# Altium PCB PCB Doc.PcbDoc (part 1 of 2)
Units mm, origin at the board's own origin, x right, y up, seen from the top; angles counter-clockwise.
Board outline 76.61 x 32.18 mm, 4 copper layers (Top Layer, Ground Planes, Power Planes, Bottom Layer), stack 0.778 mm thick; 49 components, 50 nets, 397 pads, 104 vias.
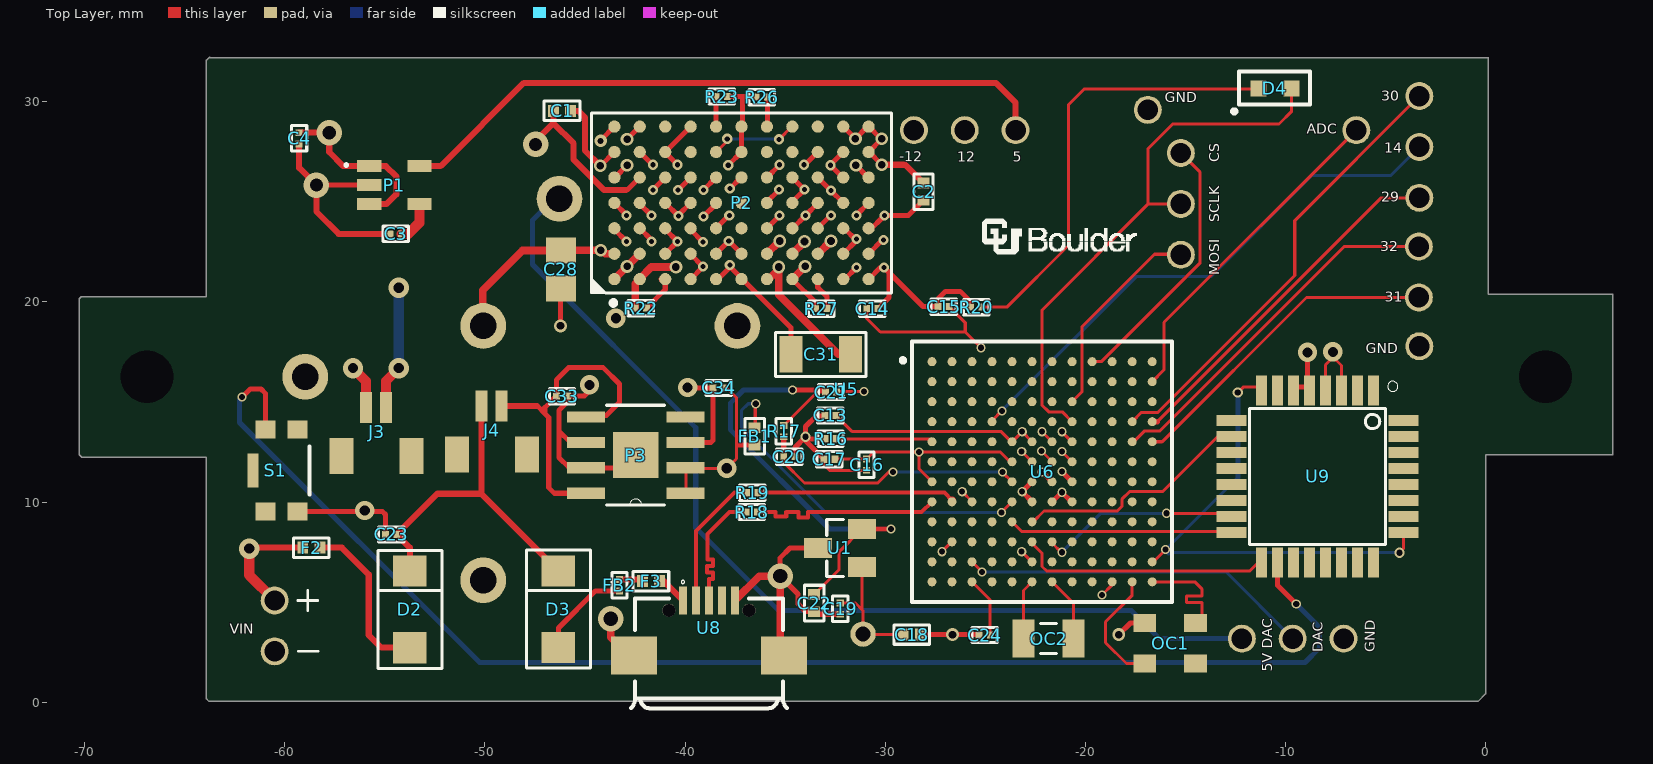
[diagram p0: Top Layer view]
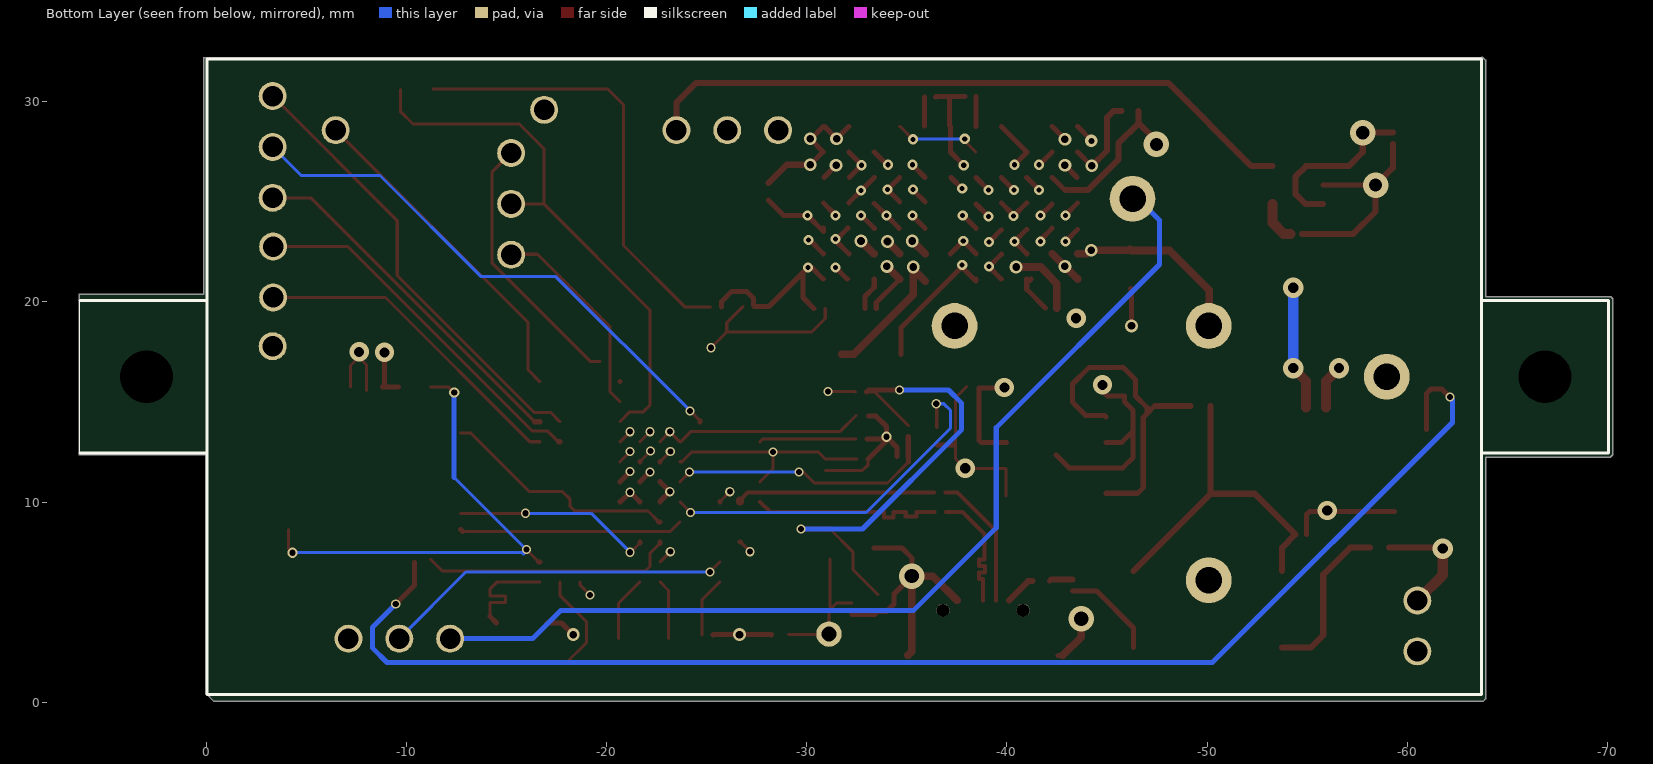
[diagram p1: Bottom Layer view, seen from below]
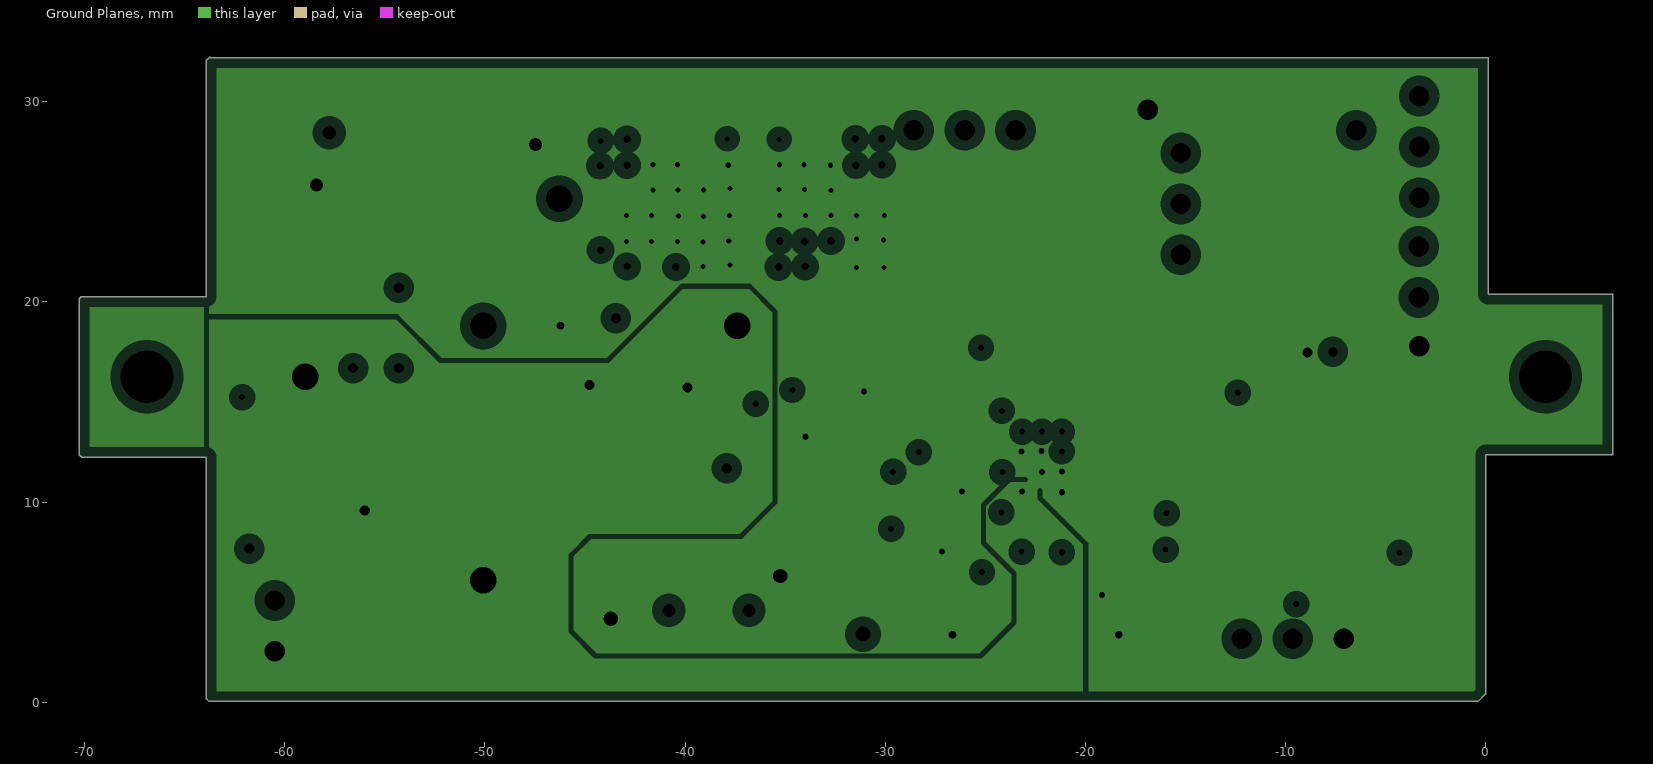
[diagram p2: Ground Planes, clearances drawn from the general rule]
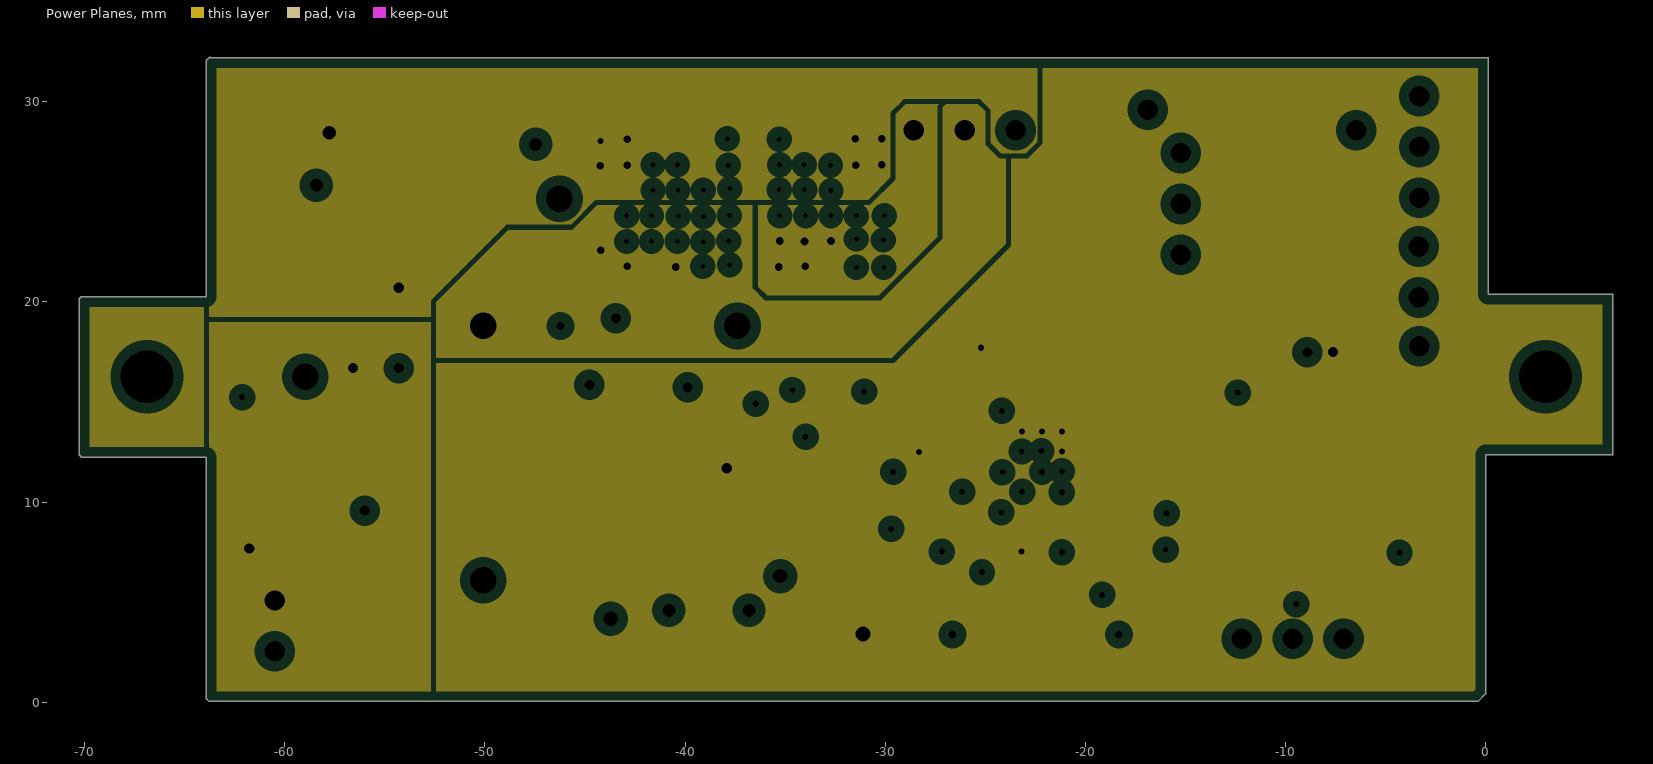
[diagram p3: Power Planes, clearances drawn from the general rule]
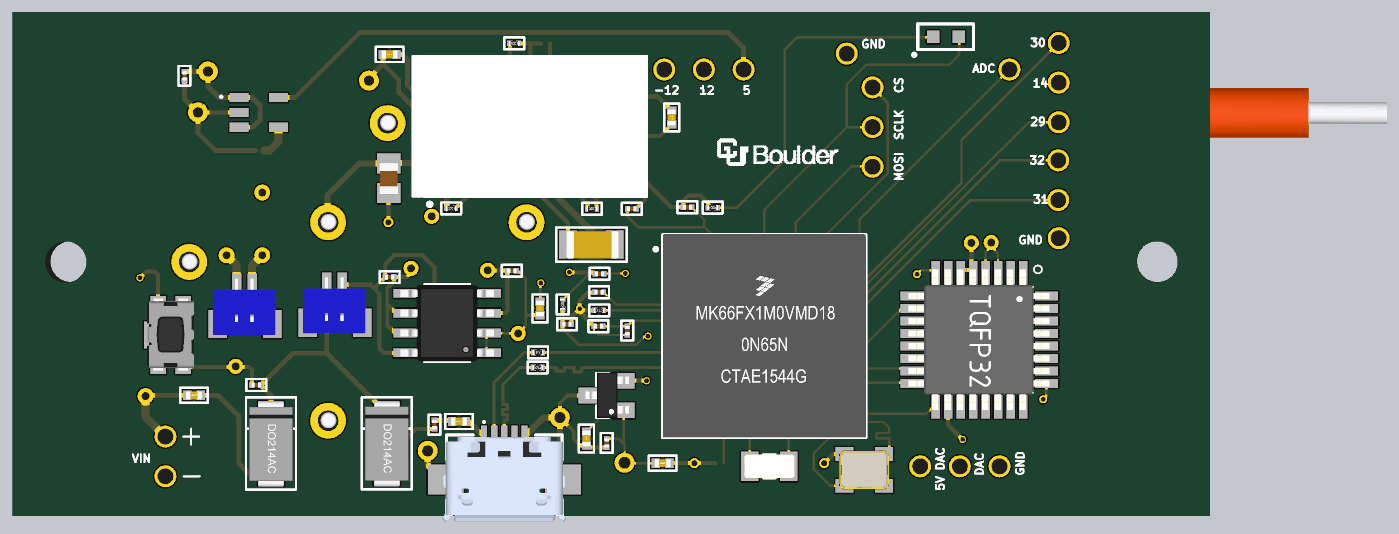
[diagram p5: 3D render of the assembled board from above, using the file's embedded part models]

## Layer stack, top to bottom
Top Solder: solder mask 0.0102, Solder Resist, Dk 3.5
Top Layer: signal copper 0.0356
Dielectric 1: core 0.254, FR-4, Dk 4.2
Ground Planes: plane copper 0.036, net VSSA
Dielectric 2: prepreg 0.127, Dk 4.2
Power Planes: plane copper 0.036, net (Multiple Nets)
Dielectric 5: core 0.254, Dk 4.2
Bottom Layer: signal copper 0.0356
Bottom Solder: solder mask 0.0102, Solder Resist, Dk 3.5

## Board outline
-70.139,12.234 ccw(c-70.129,12.243) -70.129,12.23 -63.919,12.23 -63.919,0.178 ccw(c-63.906,0.178) -63.916,0.169 -63.789,0.042 ccw(c-63.779,0.051) -63.779,0.038 -0.406,0.038 ccw(c-0.406,0.051) -0.397,0.042 -0.016,0.423 ccw(c-0.025,0.432) -0.012,0.432 -0.012,12.357 6.325,12.357 ccw(c6.325,12.37) 6.338,12.37 6.338,20.371 ccw(c6.325,20.371) 6.325,20.384 0.115,20.384 0.115,32.182 ccw(c0.102,32.182) 0.102,32.195 -63.779,32.195 ccw(c-63.779,32.182) -63.789,32.191 -63.763,32.216 cw(c-63.754,32.207) -63.741,32.207 cw(c-63.754,32.207) -63.745,32.198 -63.748,32.195 -63.763,32.216 -63.916,32.064 ccw(c-63.906,32.055) -63.919,32.055 -63.919,20.257 -70.155,20.257 ccw(c-70.155,20.244) -70.164,20.253 -70.266,20.151 ccw(c-70.256,20.142) -70.269,20.142 -70.269,12.37 ccw(c-70.256,12.37) -70.266,12.361

## Design rules (kind name [scope] priority, off if disabled: settings)
Clearance Clearance_BGA_LTM8049 [WithinRoom('BGA_LTM8049')] p1: gap=0.152 ignorepadtopadclearanceinfootprint=FALSE
Clearance Clearance_BGA_MK66 [WithinRoom('BGA_MK66')] p2: gap=0.152 ignorepadtopadclearanceinfootprint=FALSE
Clearance [All] p3 off: gap=0.254 ignorepadtopadclearanceinfootprint=FALSE except(0: Arc-Hole Track-Hole SMDPad-Hole THPad-Hole Via-Hole Fill-Hole Poly-Hole Region-Hole Text-Hole)
DiffPairsRouting [All] p1: maxlimit=0.254 minlimit=0.254 mostfreqgap=0.254 toplayer_minwidth=0.381 toplayer_maxwidth=0.381 toplayer_prefwidth=0.381 bottomlayer_minwidth=0.381 bottomlayer_maxwidth=0.381 bottomlayer_prefwidth=0.381 maxuncoupledlength=12.7
PlaneClearance [All] p1: clearance=0.508
PlaneConnect [All] p1: planeconnectstyle=Relief reliefexpansion=0.203 reliefentries=4 reliefconductorwidth=0.254 reliefairgap=0.152
PolygonConnect [All] p1: connectstyle=Relief reliefconductorwidth=0.152 reliefentries=4 polygonreliefangle="90 Angle" airgapwidth=0.152
RoomDefinition MCU [InComponentClass('MCU')] p1: confinementstyle=ConfineIn formatcopy=TRUE lockcomponents=FALSE outline -116.23,-55.194 -65.43,-55.194 -65.43,-29.794 -116.23,-29.794
RoomDefinition "EMCO DC-DC" [InComponentClass('EMCO DC-DC')] p2: confinementstyle=ConfineIn formatcopy=TRUE lockcomponents=FALSE outline -116.23,-55.194 -65.43,-55.194 -65.43,-29.794 -116.23,-29.794
RoutingVias RoutingVias_BGA_LTM8049 [WithinRoom('BGA_LTM8049')] p1: holewidth=0.381 width=0.762 viastyle="Through Hole" minholewidth=0.381 minwidth=0.762 maxholewidth=0.381 maxwidth=0.762
RoutingVias RoutingVias_BGA_MK66 [WithinRoom('BGA_MK66')] p2: holewidth=0.305 width=0.559 viastyle="Through Hole" minholewidth=0.305 minwidth=0.559 maxholewidth=0.305 maxwidth=0.559
RoutingVias [All] p3: holewidth=0.711 width=1.27 viastyle="Through Hole" minholewidth=0.254 minwidth=0.381 maxholewidth=0.711 maxwidth=1.27
SolderMaskExpansion [All] p1: expansion=0.102
Width Width_VDD [InNet('VDD')] p1: maxlimit=0.152 minlimit=0.152 preferedwidth=0.152
Width Width_3.9/5 [InNet('3.9V/5V')] p2: maxlimit=0.508 minlimit=0.305 preferedwidth=0.508
Width Width_-12V [InNet('-12V')] p3: maxlimit=0.381 minlimit=0.381 preferedwidth=0.381
Width Width_12V [InNet('12V')] p4: maxlimit=0.381 minlimit=0.381 preferedwidth=0.381
Width Width_Battery [InNet('Battery')] p5: maxlimit=0.508 minlimit=0.305 preferedwidth=0.508
Width [All] p6 off: maxlimit=0.152 minlimit=0.152 preferedwidth=0.152
Width Width_BGA_LTM8049 [WithinRoom('BGA_LTM8049')] p7: maxlimit=0.152 minlimit=0.152 preferedwidth=0.152
Width Width_BGA_MK66 [WithinRoom('BGA_MK66')] p8: maxlimit=0.152 minlimit=0.152 preferedwidth=0.152
Width Width_5V [InNet('5V')] p9: maxlimit=0.508 minlimit=0.305 preferedwidth=0.305
27 further rules are at their usual default settings.

## Classes and differential pairs
component class "EMCO DC-DC": U5
component class MCU: C13 C14 C15 C16 C17 C18 C19 C20 C21 C22 C23 C24 D2 D3 D4 F2 F3 FB1 FB2 OC1 OC2 R16 R17 R18 R19 R20 S1 U1 U6 U8 U9
component class "Voltage Regulators": C1 C2 C3 C4 C28 C31 C33 C34 J3 J4 P1 P2 P3 R22 R23 R26 R27
differential pair USBD: +USBD_P -USBD_N
differential pair usb: +usb_P -usb_N

## Components (designator, comment, footprint, x,y, rotation, side; value= is the part's Value field where it differs from the comment)
C1 "GRM155R60J475" C0402C102K9RACTU -46.152,29.54 r180 top value=4.7uF
C2 "GRM155R60J475" C0402C102K9RACTU -28.092,25.502 r270 top value=4.7uF
C3 "CL03A104KA3NNNC" CL03A104KA3NNNC -46.202,37.744 r180 top value=0.1uF
C4 "CL03A104KA3NNNC" CL03A104KA3NNNC -44.933,19.914 r90 top value=0.1uF
C13 "CL03A104KA3NNNC" CL03A104KA3NNNC -24.486,28.677 r180 top value=0.1uF
C14 "CL03B103KP3NNNC" CL03B103KP3NNNC -38.906,5.309 r0 top value=0.01uF
C15 "CL03A225MP3CRNC" CL03A225MP3CRNC -18.84,34.112 r180 top value=2.2uF
C16 "CL03A104KA3NNNC" CL03A104KA3NNNC -45.288,20.117 r270 top value=0.1uF
C17 "CL03A104KA3NNNC" CL03A104KA3NNNC -24.536,26.492 r180 top value=0.1uF
C18 "GRM155R60J106ME47D" GRM155R60J106ME47D -28.675,3.378 r180 top value=10uF
C19 "CL03A104KA3NNNC" CL03A104KA3NNNC -46.609,12.928 r270 top value=0.1uF
C20 "CL03A104KA3NNNC" CL03A104KA3NNNC -43.054,-2.083 r0 top value=0.1uF
C21 "CL03A225MP3CRNC" CL03A225MP3CRNC -24.46,29.845 r180 top value=2.2uF
C22 "C0402C102K9RACTU" C0402C102K9RACTU -33.553,4.953 r270 top value=1000pF
C23 "CL03A225MP3CRNC" CL03A225MP3CRNC -46.432,22.733 r180 top value=2.2uF
C24 "CL03A104KA3NNNC" CL03A104KA3NNNC -33.3,-10.998 r0 top value=0.1uF
C28 "CL21A226MAQNNNE" CL21A226MAQNNNE -46.203,21.615 r270 top value=22uF
C31 "GRM31CR61E476ME44L" GRM31CR61E476ME44L -30.367,17.221 r0 top value=33uF
C33 "GRM033R60J105MEA2D" GRM033R60J105MEA2D -54.407,0.94 r0 top value=1uF
C34 "GRM033R60J105MEA2D" GRM033R60J105MEA2D -30.074,30.048 r180 top value=1uF
D2 "LSM115JE3/TR13" LSM115JE3/TR13 -53.797,5.07 r270 top
D3 "LSM115JE3/TR13" LSM115JE3/TR13 -46.38,5.08 r270 top
D4 "SML-LXFM0603SUGCTR" SML-LXFM0603SUGCTR -10.541,30.658 r180 top
F2 "ERB-SD0R50U" ERB-SD0R50U -58.674,7.722 r0 top
F3 "ERB-SD0R50U" ERB-SD0R50U -41.709,6.045 r0 top
FB1 "BLM15PX601SN1D" BLM15PX601SN1D -36.525,13.282 r90 top value=600
FB2 "MPZ0603S121HT000" MPZ0603S121HT000 -57.633,14.098 r270 top value=120
J3 "BM02B-SRSS-TBT" BM02B-SRSS-TBT -54.57,13.868 r0 top
J4 "BM02B-SRSS-TBT" BM02B-SRSS-TBT -48.804,13.945 r0 top
OC1 "TSX-3225 16.0000MF18X-AC3" "TSX-3225 16.0000MF18X-AC3" -15.773,2.946 r180 top value=16MHz
OC2 "ECS-.327-9-34QS-TR" ECS-.327-9-34QS-TR -21.849,3.175 r0 top value=32.768kHz
P1 "REG113NA" REG113NA-5/3K -54.529,25.832 r0 top
P2 "LTM8049EY#PBF" LTM8049EY#PBF -37.186,24.943 r90 top
P3 "ADP7104ACPZ-3.3-R7" ADP7104ARDZ-3.3 -42.469,12.344 r180 top
R16 "RC0201FR-07100KL" RC0201FR-07100KL -24.485,27.508 r180 top value=100k
R17 "RC0201JR-07470RL" RC0201JR-07470RL -49.428,21.794 r270 top value=470
R18 "RC0201JR-0733RL" RC0201JR-0733RL -28.422,23.851 r180 top value=33
R19 "RC0201JR-0733RL" RC0201JR-0733RL -28.397,24.816 r180 top value=33
R20 "RC0201FR-07140RL" RC0201FR-07140RL -17.214,34.087 r180 top value=140
R22 "RC0201FR-07130KL" RC0201FR-07130KL -50.469,5.334 r0 top value=130k
R23 "RC0201FR-0780K6L" RC0201FR-0780K6L -46.432,15.9 r0 top value=80.6k
R26 "RC0201FR-0780K6L" RC0201FR-0780K6L -27.914,44.577 r180 top value=80.6k
R27 "RC0201FR-07143KL" RC0201FR-07143KL -41.453,5.309 r0 top value=143k
S1 "KMR231NG LFS" KMR221GLFS -60.173,11.582 r90 top
U1 "ISL60002BIH325Z-T7A" ISL60002-25 -32.266,7.706 r90 top
U5 "C80" C80 -0.051,32.131 r180 top
U6 "MK66FX1M0VMD18" MK66FX1M0VMD18 -22.173,11.511 r0 top
U8 "10118192-0001LF" 10118192-0001LF -38.811,2.337 r0 top
U9 "MKL04Z32VLC4" MKL04Z32VLC4-ND -8.407,11.278 r270 top

## Footprints (in the part's own frame and the unit in brackets; to place one, negate y for a bottom-side part, rotate by r counter-clockwise, add the part's x,y. Pads: shape width x height; smd on the part's side, far side on the other; paste and mask are expansions set on the pad)
10118192-0001LF [mm]
  rect 0.4x1.4 smd: 1(-1.3,2.75) 2(-0.65,2.75) 3(0,2.75) 4(0.65,2.75) 5(1.3,2.75)
  rect 2.3x1.9 smd: 6(-3.75,0) 7(3.75,0)
  round 0.65 hole 0.65 unplated: None(-2,2.25) None(2,2.25)
  silkscreen extent -3.89,-2.64 3.89,3.75, body extent -3.99,-2.7 3.99,2.73, height 2.74
ADP7104ARDZ-3.3 [mil]
  rect 75x22 smd: 1(-98,75) 2(-98,25) 3(-98,-25) 4(-98,-75) 5(98,-75) 6(98,-25) 7(98,25) 8(98,75)
  rect 90x90 smd: 9(0,0)
  silkscreen extent -57,-98 57,99, body extent -118,-96 118,96, height 67
BLM15PX601SN1D [mm]
  rect 0.54x0.6 smd: 1(-0.43,0) 2(0.43,0)
  silkscreen extent -0.89,-0.48 0.89,0.48, body extent -0.53,-0.28 0.52,0.27, height 0.55
BM02B-SRSS-TBT [mm]
  rect 0.6x1.55 smd: 1(-1.377,0.86) 2(-0.377,0.86)
  rect 1.2x1.8 smd: ""(-2.591,-1.575) ""(0.9,-1.575)
  body extent -2.89,-2.28 1.11,1.32, height 4.28
C80 [mil]
  round 90 hole 52: 1(1970,525) 2(1970,1025) 3(1820,275) 4(1470,525) 5(2320,625)
  round 0 hole 104 unplated: ""(-119,625) ""(2631,625)
  body extent -698,-1 2749,1249, height 100
C0402C102K9RACTU [mm]
  rect 0.54x0.6 smd: 1(-0.43,0) 2(0.43,0)
  silkscreen extent -0.89,-0.48 0.89,0.48, body extent -0.53,-0.28 0.52,0.27, height 0.55
CL03A104KA3NNNC [mm]
  rect 0.34x0.36 smd: 1(7.975,14.351) 2(8.535,14.351)
  silkscreen extent 7.62,13.97 8.89,14.73, body extent 7.96,14.2 8.56,14.5, height 0.3
CL03A225MP3CRNC [mm]
  rect 0.34x0.36 smd: 1(7.975,14.351) 2(8.535,14.351)
  silkscreen extent 7.62,13.97 8.89,14.73, body extent 7.96,14.2 8.56,14.5, height 0.3
CL03B103KP3NNNC [mm]
  rect 0.34x0.36 smd: 1(7.975,14.351) 2(8.535,14.351)
  silkscreen extent 7.62,13.97 8.89,14.73, body extent 7.96,14.2 8.56,14.5, height 0.3
CL21A226MAQNNNE [mm]
  rect 1.3x1.5 smd: 1(-0.95,0) 2(0.95,0)
  body extent -0.97,-0.6 1.03,0.6, height 0.95
ECS-.327-9-34QS-TR [mm]
  rect 1.1x1.9 smd: 1(-1.25,0) 2(1.25,0)
  silkscreen extent -0.4,-0.75 0.4,0.75, body extent -1.6,-0.75 1.6,0.75, height 0.9
ERB-SD0R50U [mm]
  rect 0.54x0.6 smd: 1(-0.43,0) 2(0.43,0)
  silkscreen extent -0.89,-0.48 0.89,0.48, body extent -0.53,-0.28 0.52,0.27, height 0.55
GRM31CR61E476ME44L [mm]
  rect 1.15x1.82 smd: 1(-4.355,0.152) 2(-1.385,0.152)
  silkscreen extent -5.13,-0.95 -0.61,1.24, body extent -4.49,-0.76 -1.09,1.04, height 1.79
GRM033R60J105MEA2D [mm]
  rect 0.34x0.36 smd: 1(7.975,14.351) 2(8.535,14.351)
  silkscreen extent 7.62,13.97 8.89,14.73, body extent 7.96,14.2 8.56,14.5, height 0.3
GRM155R60J106ME47D [mm]
  rect 0.54x0.6 smd: 1(-0.43,0) 2(0.43,0)
  silkscreen extent -0.89,-0.48 0.89,0.48, body extent -0.53,-0.28 0.52,0.27, height 0.55
ISL60002-25 [mm]
  rect 1x1.4 smd: 1(-0.95,-1.1) 2(0.95,-1.1) 3(0,1.1)
  silkscreen extent -1.42,-0.19 1.42,0.66, body extent -1.42,-1.45 1.48,1.35, height 1.3
KMR221GLFS [mm]
  rect 0.9x1 smd: 1(-2.05,0.8) 2(-2.05,-0.8) 3(2.05,-0.8) 4(2.05,0.8)
  rect 1.7x0.55 smd: 5(0,1.425)
  silkscreen extent -1.2,-1.4 1.2,-1.4, body extent -2.27,-1.5 2.33,1.5, height 2.1
LSM115JE3/TR13 [mm]
  rect 1.555x1.67 smd: 1(-1.483,0.051) 2(2.347,0.051)
  silkscreen extent -2.52,-1.55 3.38,1.65, body extent -2.29,-1.35 3.2,1.45, height 2.36
LTM8049EY#PBF [mm]
  round 0.61 smd: A1(-3.81,6.35) A2(-2.54,6.35) A3(-1.27,6.35) A4(0,6.35) A5(1.27,6.35) A6(2.54,6.35) A7(3.81,6.35) B1(-3.81,5.08) B2(-2.54,5.08) B3(-1.27,5.08) B4(0,5.08) B5(1.27,5.08) B6(2.54,5.08) B7(3.81,5.08) C1(-3.81,3.81) C2(-2.54,3.81) C3(-1.27,3.81) C4(0,3.81) C5(1.27,3.81) C6(2.54,3.81) C7(3.81,3.81) D1(-3.81,2.54) D2(-2.54,2.54) D3(-1.27,2.54) D4(0,2.54) D5(1.27,2.54) D6(2.54,2.54) D7(3.81,2.54) E1(-3.81,1.27) E2(-2.54,1.27) E3(-1.27,1.27) E4(0,1.27) E5(1.27,1.27) E6(2.54,1.27) E7(3.81,1.27) F1(-3.81,0) F2(-2.54,0) F3(-1.27,0) F4(0,0) F5(1.27,0) F6(2.54,0) F7(3.81,0) G1(-3.81,-1.27) G2(-2.54,-1.27) G3(-1.27,-1.27) G4(0,-1.27) G5(1.27,-1.27) G6(2.54,-1.27) G7(3.81,-1.27) H1(-3.81,-2.54) H2(-2.54,-2.54) H3(-1.27,-2.54) H4(0,-2.54) H5(1.27,-2.54) H6(2.54,-2.54) H7(3.81,-2.54) J1(-3.81,-3.81) J2(-2.54,-3.81) J3(-1.27,-3.81) J4(0,-3.81) J5(1.27,-3.81) J6(2.54,-3.81) J7(3.81,-3.81) K1(-3.81,-5.08) K2(-2.54,-5.08) K3(-1.27,-5.08) K4(0,-5.08) K5(1.27,-5.08) K6(2.54,-5.08) K7(3.81,-5.08) L1(-3.81,-6.35) L2(-2.54,-6.35) L3(-1.27,-6.35) L4(0,-6.35) L5(1.27,-6.35) L6(2.54,-6.35) L7(3.81,-6.35)
  silkscreen extent -5.12,-7.5 4.5,7.5, body extent -4.43,-7.44 4.57,7.56, height 2.42
MK66FX1M0VMD18 [mm]
  round 0.45 smd: A1(-5.5,5.5) A2(-4.5,5.5) A3(-3.5,5.5) A4(-2.5,5.5) A5(-1.5,5.5) A6(-0.5,5.5) A7(0.5,5.5) A8(1.5,5.5) A9(2.5,5.5) A10(3.5,5.5) A11(4.5,5.5) A12(5.5,5.5) B1(-5.5,4.5) B2(-4.5,4.5) B3(-3.5,4.5) B4(-2.5,4.5) B5(-1.5,4.5) B6(-0.5,4.5) B7(0.5,4.5) B8(1.5,4.5) B9(2.5,4.5) B10(3.5,4.5) B11(4.5,4.5) B12(5.5,4.5) C1(-5.5,3.5) C2(-4.5,3.5) C3(-3.5,3.5) C4(-2.5,3.5) C5(-1.5,3.5) C6(-0.5,3.5) C7(0.5,3.5) C8(1.5,3.5) C9(2.5,3.5) C10(3.5,3.5) C11(4.5,3.5) C12(5.5,3.5) D1(-5.5,2.5) D2(-4.5,2.5) D3(-3.5,2.5) D4(-2.5,2.5) D5(-1.5,2.5) D6(-0.5,2.5) D7(0.5,2.5) D8(1.5,2.5) D9(2.5,2.5) D10(3.5,2.5) D11(4.5,2.5) D12(5.5,2.5) E1(-5.5,1.5) E2(-4.5,1.5) E3(-3.5,1.5) E4(-2.5,1.5) E5(-1.5,1.5) E6(-0.5,1.5) E7(0.5,1.5) E8(1.5,1.5) E9(2.5,1.5) E10(3.5,1.5) E11(4.5,1.5) E12(5.5,1.5) F1(-5.5,0.5) F2(-4.5,0.5) F3(-3.5,0.5) F4(-2.5,0.5) F5(-1.5,0.5) F6(-0.5,0.5) F7(0.5,0.5) F8(1.5,0.5) F9(2.5,0.5) F10(3.5,0.5) F11(4.5,0.5) F12(5.5,0.5) G1(-5.5,-0.5) G2(-4.5,-0.5) G3(-3.5,-0.5) G4(-2.5,-0.5) G5(-1.5,-0.5) G6(-0.5,-0.5) G7(0.5,-0.5) G8(1.5,-0.5) G9(2.5,-0.5) G10(3.5,-0.5) G11(4.5,-0.5) G12(5.5,-0.5) H1(-5.5,-1.5) H2(-4.5,-1.5) H3(-3.5,-1.5) H4(-2.5,-1.5) H5(-1.5,-1.5) H6(-0.5,-1.5) H7(0.5,-1.5) H8(1.5,-1.5) H9(2.5,-1.5) H10(3.5,-1.5) H11(4.5,-1.5) H12(5.5,-1.5) J1(-5.5,-2.5) J2(-4.5,-2.5) J3(-3.5,-2.5) J4(-2.5,-2.5) J5(-1.5,-2.5) J6(-0.5,-2.5) J7(0.5,-2.5) J8(1.5,-2.5) J9(2.5,-2.5) J10(3.5,-2.5) J11(4.5,-2.5) J12(5.5,-2.5) K1(-5.5,-3.5) K2(-4.5,-3.5) K3(-3.5,-3.5) K4(-2.5,-3.5) K5(-1.5,-3.5) K6(-0.5,-3.5) K7(0.5,-3.5) K8(1.5,-3.5) K9(2.5,-3.5) K10(3.5,-3.5) K11(4.5,-3.5) K12(5.5,-3.5) L1(-5.5,-4.5) L2(-4.5,-4.5) L3(-3.5,-4.5) L4(-2.5,-4.5) L5(-1.5,-4.5) L6(-0.5,-4.5) L7(0.5,-4.5) L8(1.5,-4.5) L9(2.5,-4.5) L10(3.5,-4.5) L11(4.5,-4.5) L12(5.5,-4.5) M1(-5.5,-5.5) M2(-4.5,-5.5) M3(-3.5,-5.5) M4(-2.5,-5.5) M5(-1.5,-5.5) M6(-0.5,-5.5) M7(0.5,-5.5) M8(1.5,-5.5) M9(2.5,-5.5) M10(3.5,-5.5) M11(4.5,-5.5) M12(5.5,-5.5)
  silkscreen extent -7.05,-6.5 6.5,6.5, body extent -6.47,-6.47 6.53,6.53, height 1.1
MKL04Z32VLC4-ND [mm]
  rect 1.5x0.55 smd: 1(-4.3,2.8) 2(-4.3,2) 3(-4.3,1.2) 4(-4.3,0.4) 5(-4.3,-0.4) 6(-4.3,-1.2) 7(-4.3,-2) 8(-4.3,-2.8) 17(4.3,-2.8) 18(4.3,-2) 19(4.3,-1.2) 20(4.3,-0.4) 21(4.3,0.4) 22(4.3,1.2) 23(4.3,2) 24(4.3,2.8)
  rect 0.55x1.5 smd: 9(-2.8,-4.3) 10(-2,-4.3) 11(-1.2,-4.3) 12(-0.4,-4.3) 13(0.4,-4.3) 14(1.2,-4.3) 15(2,-4.3) 16(2.8,-4.3) 25(2.8,4.3) 26(2,4.3) 27(1.2,4.3) 28(0.4,4.3) 29(-0.4,4.3) 30(-1.2,4.3) 31(-2,4.3) 32(-2.8,4.3)
  silkscreen extent -4.75,-3.4 3.4,4, body extent -4.51,-4.53 4.51,4.48, height 1.1
MPZ0603S121HT000 [mm]
  rect 0.34x0.36 smd: 1(7.975,14.351) 2(8.535,14.351)
  silkscreen extent 7.62,13.97 8.89,14.73, body extent 7.96,14.2 8.56,14.5, height 0.3
RC0201FR-0780K6L [mm]
  rect 0.34x0.36 smd: 1(7.975,14.351) 2(8.535,14.351)
  silkscreen extent 7.62,13.97 8.89,14.73, body extent 7.92,14.19 8.6,14.52, height 0.34
RC0201FR-07100KL [mm]
  rect 0.34x0.36 smd: 1(7.975,14.351) 2(8.535,14.351)
  silkscreen extent 7.62,13.97 8.89,14.73, body extent 7.92,14.19 8.6,14.52, height 0.34
RC0201FR-07130KL [mm]
  rect 0.34x0.36 smd: 1(7.975,14.351) 2(8.535,14.351)
  silkscreen extent 7.62,13.97 8.89,14.73, body extent 7.92,14.19 8.6,14.52, height 0.34
RC0201FR-07140RL [mm]
  rect 0.34x0.36 smd: 1(7.975,14.351) 2(8.535,14.351)
  silkscreen extent 7.62,13.97 8.89,14.73, body extent 7.92,14.19 8.6,14.52, height 0.34
RC0201FR-07143KL [mm]
  rect 0.34x0.36 smd: 1(7.975,14.351) 2(8.535,14.351)
  silkscreen extent 7.62,13.97 8.89,14.73, body extent 7.92,14.19 8.6,14.52, height 0.34
RC0201JR-0733RL [mm]
  rect 0.34x0.36 smd: 1(7.975,14.351) 2(8.535,14.351)
  silkscreen extent 7.62,13.97 8.89,14.73, body extent 7.92,14.19 8.6,14.52, height 0.34
RC0201JR-07470RL [mm]
  rect 0.34x0.36 smd: 1(7.975,14.351) 2(8.535,14.351)
  silkscreen extent 7.62,13.97 8.89,14.73, body extent 7.92,14.19 8.6,14.52, height 0.34
REG113NA-5/3K [mm]
  rect 1.21x0.59 smd: 1(-1.255,0.95) 2(-1.255,0) 3(-1.255,-0.95) 4(1.255,-0.95) 5(1.255,0.95)
  silkscreen extent -2.47,0.93 -2.33,1.07
SML-LXFM0603SUGCTR [mm]
  rect 0.8x0.8 smd: 1(-0.825,0) 2(0.825,0)
  silkscreen extent -1.75,-0.84 2.11,1.22
"TSX-3225 16.0000MF18X-AC3" [mil]
  rect 45x35 smd: 1(-50,-40) 2(50,-40) 3(50,40) 4(-50,40)
  body extent -63,-49 63,49, height 24

## Part data
C1 C2: "CAP CER 4.7UF 6.3V X5R 0402", Digikey Part Number=?490-5915-1-ND?, Manufacturer=Murata, Manufacturer Part Number=GRM155R60J475ME47D?, Package=0402, Temperature Coefficient=X5R, Voltage Rated=6.3V, Supplier=Digikey, Unit Price=$0.55
C3 C4 C13 C16 C17 C19 C20 C24: "CAP CER 0.1UF 25V X5R 0201", Digikey Part Number=1276-1318-6-ND, Manufacturer=Samsung, Package="0201 (0603 Metric)", Temperature Coefficient=X5R, Voltage Rated=25V, Manufacturer Part Number=CL03A104KA3NNNC, Supplier=Digikey, Unit Price=$0.75
C14: "CAP CER 10000PF 10V X7R 0201", Digikey Part Number=1276-1152-1-ND, Manufacturer=Samsung, Package="0201 (0603 Metric)", Temperature Coefficient=X7R, Voltage Rated=10V, Manufacturer Part Number=CL03B103KP3NNNC, Supplier=Digikey, Unit Price=0.13
C15 C21 C23: "CAP CER 2.2UF 10V X5R 0201", Digikey Part Number=1276-6829-1-ND, Manufacturer=Samsung, Package="0201 (0603 Metric)", Temperature Coefficient=X5R, Voltage Rated=10V, Manufacturer Part Number=CL03A225MP3CRNC, Supplier=Digikey, Unit Price=$0.41
C18: "CAP CER 10UF 6.3V X5R 0402", Digikey Part Number=490-13239-1-ND, Manufacturer=Murata, Package="0402 (1005 Metric)", Temperature Coefficient=X5R, Voltage Rated=6.3V, Manufacturer Part Number=GRM155R60J106ME47D, Supplier=Digikey, Unit Price=$0.85
C22: "CAP CER 1000PF 6.3V X7R 0402", Digikey Part Number=399-8941-6-ND, Manufacturer=Murata, Manufacturer Part Number=GRM155R60J106ME47D, Package="0402 (1005 Metric)", Temperature Coefficient=X7R, Voltage Rated=6.3V, Supplier=Digikey, Unit Price=$0.1
C28: "CAP CER 22UF 25V X5R 0805", Digikey Part Number=1276-2908-1-ND, Manufacturer=Samsung, Package="0603 (1608 Metric)", Temperature Coefficient=X5R, Voltage Rated=25V, Manufacturer Part Number=CL21A226MAQNNNE, Supplier=Digikey, Unit Price=$0.75
C31: library part C3216JB1E336M160AC, "CAP CER 33UF 25V JB 1206", Digikey Part Number=445-11710-1-ND, Manufacturer="TDK Corporation", Package="1206 (3216 Metric)", Temperature Coefficient=X5R, Voltage Rated=25V, Manufacturer Part Number=C3216JB1E336M160AC, Supplier=Digikey, Unit Price=$0.75
C33 C34: "CAP CER 1UF 6.3V X5R 0201", Digikey Part Number=490-7229-1-ND, Manufacturer=Murata, Package="0201 (0603 Metric)", Temperature Coefficient=X5R, Voltage Rated=6.3V, Manufacturer Part Number=GRM033R60J105MEA2D, Supplier=Digikey, Unit Price=$0.15
D2 D3: "DIODE SCHOTTKY 15V 1A DO214AC", Digikey Part Number=LSM115JE3/TR13CT-ND, Forward Voltage="220mV @ 1A", Manufacturer=Microsemi, Package=DO-214AC, DC Reverse=15V, Manufacturer Part Number=LSM115JE3/TR13, Supplier=Digikey, Unit Price=$1.17
D4: "LED GREEN CLEAR SMD", Current=10mA, Digikey Part Number=67-2320-1-ND, Forward Voltage=2.2, Manufacturer="Lumex Opto/Components Inc.", Package="0603 (1608 Metric)", Manufacturer Part Number=SML-LXFM0603SUGCTR, Supplier=Digikey, Unit Price=$1.06, Wavelength="Green (571nm)"
F2 F3: "FUSE BOARD MNT 500MA 24VDC 0402", Digikey Part Number=P11361CT-ND, Forward Voltage=500mA, Manufacturer=Panasonic, Package=0402, Manufacturer Part Number=ERB-SD0R50U, Supplier=Digikey, Unit Price=$0.48
FB1: "FERRITE BEAD 600 OHM 0402 1LN", Current Rating=900mA, Digikey Part Number=445-180338-6-ND, Impedance @ Frequency="600 Ohms @ 100MHz", Manufacturer=Murata, Package="0402 (1005 Metric)", Manufacturer Part Number=BLM15PX601SN1D, Supplier=Digikey, Unit Price=$0.15
FB2: "CHIP BEADS FOR GENERAL SIGNAL LI", Current Rating=1A, Digikey Part Number=445-180338-6-ND, Impedance @ Frequency="120 Ohms @ 100MHz", Manufacturer=TDK, Package="0201 (0603 Metric)", Manufacturer Part Number=MPZ0603S121HT000, Supplier=Digikey, Unit Price=$0.15
J3 J4: "CONN WIRE HDR 2POS 1MM STSMD", Digikey Part Number=455-2955-1-ND, Manufacturer=JST, Manufacturer Part Number=BM02B-SRSS-TBT, Unit Price=$7.85
OC1: "CRYSTAL 16.0000MHZ 9PF SMD", Digikey Part Number=SER3636CT-ND, Manufacturer=EPSON, Package=4-SMD, Manufacturer Part Number="TSX-3225 16.0000MF18X-AC3", Supplier=Digikey, Unit Price=$0.56
OC2: "CRYSTAL 32.768KHZ 9PF SMD", Digikey Part Number=XC2156DKR-ND, Manufacturer=ECS, Package=2-SMD, Manufacturer Part Number=ECS-.327-9-34QS-TR, Supplier=Digikey, Unit Price=$0.74
P1: library part REG113NA-5/3K, "LDO Voltage Regulators DMOS 400mA Regulator Low-Dropout", Manufacturer=LT, Package=SOT-23-5, Digikey=REG113NA-5/3KCT-ND, Manufacturer Part Number=REG113NA-5/3K, Supplier=Digikey, Unit Price=$2.76
P2: "DC DC CONVERTER +/-2.5 TO +/-24V", Digikey Part Number=LTM8049EY#PBF-ND, Manufacturer="Linear Technology", Package / Case=77-BBGA, Manufacturer Part Number=LTM8049EY#PBF, Unit Price=$24.75
P3: "IC REG LINEAR 3.3V 500MA 8LFCSP", Current Output=500mA, Digikey Part Number=ADP7104ACPZ-3.3-R7DKR-ND, Manufacturer="Analog Devices", Package=8-LFCSP_WD, Voltage Input="20V (max)", Voltage Output="3.3V (fixed)", Manufacturer Part Number=ADP7104ACPZ-3.3-R7, Unit Price=$4.5
R16: "RES SMD 100K OHM 1% 1/20W 0201", Digikey Part Number=311-100KMCT-ND, Manufacturer=Yageo, Package="0201 (0603 Metric)", Power (Watts)=0.05W, Manufacturer Part Number=RC0201FR-07100KL, Supplier=Digikey, Unit Price=0.1
R17: "RES SMD 470 OHM 5% 1/20W 0201", Digikey Part Number=311-470NCT-ND, Manufacturer=Yageo, Package="0201 (0603 Metric)", Power (Watts)=0.05W, Manufacturer Part Number=RC0201JR-07470RL, Supplier=Digikey, Unit Price=0.1
R18 R19: "RES SMD 33 OHM 5% 1/20W 0201", Digikey Part Number=311-33NCT-ND, Manufacturer=Yageo, Package="0201 (0603 Metric)", Power (Watts)=0.05W, Manufacturer Part Number=RC0201JR-0733RL, Supplier=Digikey, Unit Price=0.1
R20: "RES SMD 140 OHM 1% 1/20W 0201", Digikey Part Number=YAG2406DKR-ND, Manufacturer=Yageo, Manufacturer Part Number=RC0201JR-0768RL, Package="0201 (0603 Metric)", Power (Watts)=0.05W, Supplier=Digikey, Unit Price=0.1
R22: "RES SMD 130K OHM 1% 1/20W 0201", Digikey Part Number=YAG2393DKR-ND, Manufacturer=Yageo, Package="0201 (0603 Metric)", Power (Watts)=0.05W, Manufacturer Part Number=RC0201FR-07130KL, Supplier=Digikey, Unit Price=0.1
R23 R26: "RES SMD 80.6K OHM 1% 1/20W 0201", Digikey Part Number=YAG2810DKR-ND, Manufacturer=Yageo, Package="0201 (0603 Metric)", Power (Watts)=0.05W, Manufacturer Part Number=RC0201FR-0780K6L, Supplier=Digikey, Unit Price=0.1
R27: "RES SMD 143K OHM 1% 1/20W 0201", Digikey Part Number=YAG2407CT-ND, Manufacturer=Yageo, Package="0201 (0603 Metric)", Power (Watts)=0.05W, Manufacturer Part Number=RC0201FR-07143KL, Supplier=Digikey, Unit Price=0.1
S1: "SWITCH TACTILE SPST-NO 0.02A 15V", Digikey Part Number=CKN10246TR-ND, Manufacturer=C&K, Package=SPST-NO, Manufacturer Part Number="KMR231NG LFS", Supplier=Digikey, Unit Price=$0.58
U1: "IC VREF SERIES 2.5V SOT23-3", Digikey Part Number=ISL60002BIH325Z-T7ADKR-ND, Manufacturer="Renesas Electronics", Manufacturer Part Number=ISL60002BIH325Z-TK, Package=SOT-23-3, Supplier=Digikey, Unit Price=$6.41
U5: "DC DC CONVERTER 8000V 1W", Digikey Part Number=1470-3260-ND, Manufacturer="XP Power", Package="5-DIP Module", Manufacturer Part Number=C80, Supplier=Digikey, Unit Price=$393.30
U6: "Kinetis K66: 180MHz Cortex-M4F MCU, 1.2MB Flash, 256KB SRAM, 2xUSB, Ethernet, 144-MAPBGA", Digikey Part Number=568-13335-ND, Manufacturer="NXP Semiconductors", Package / Case=144-LBGA, Manufacturer Part Number=MK66FX1M0VMD18, Unit Price=$17.64
U8: "CONN USB MICRO B RECPT SMT R/A", Digikey Part Number=609-4613-1-ND, Manufacturer="Amphenol FCL", Manufacturer Part Number=10118192-0001LF, Supplier=Digikey, Unit Price=$0.42
U9: "IC MCU 32BIT 32KB FLASH 32LQFP", Digikey Part Number=MKL04Z32VLC4-ND, Manufacturer="NXP Semiconductors", Package / Case=32-LQFP, Manufacturer Part Number=MKL04Z32VLC4, Unit Price=$2.51

## Free pads (board coordinates)
  round 1.397 hole 1.02: 15(-60.503,2.54) 15(-15.24,24.892) 15(-3.353,20.218) 15(-3.327,27.737) 16(-15.24,22.352) 16(-3.327,17.78) 16(-3.327,25.197) ""(-60.503,5.08) ""(-15.24,27.432) ""(-12.192,3.175) ""(-7.112,3.175) ""(-6.477,28.575) ""(-3.353,22.758) ""(-3.327,30.277)
  round 1.397 hole 1.016: 18(-9.652,3.175) ""(-28.575,28.575) ""(-26.035,28.575) ""(-23.495,28.575) ""(-16.891,29.591)
  round 1.27 hole 0.762: ""(-31.115,3.404)

## Via types
v1: diameter 0.508, hole 0.254, Top Layer to Bottom Layer, tented both sides, 36 vias
v2: diameter 0.457, hole 0.305, Top Layer to Bottom Layer, tented both sides, 23 vias
v3: diameter 0.635, hole 0.381, Top Layer to Bottom Layer, tented both sides, 15 vias
v4: diameter 0.965, hole 0.508, Top Layer to Bottom Layer, 7 vias
v5: diameter 0.457, hole 0.305, Top Layer to Bottom Layer, 7 vias
v6: diameter 1.016, hole 0.508, Top Layer to Bottom Layer, 4 vias
v7: diameter 1.27, hole 0.66, Top Layer to Bottom Layer, 3 vias
v8: diameter 0.508, hole 0.305, Top Layer to Bottom Layer, 3 vias
v9: diameter 0.635, hole 0.381, Top Layer to Bottom Layer, 3 vias
v10: diameter 1.27, hole 0.711, Top Layer to Bottom Layer, 2 vias
v11: diameter 0.635, hole 0.305, Top Layer to Bottom Layer, tented both sides, 1 vias

## Nets (pads, with @x,y where several pads share a name; then routed paths per layer and width w, separated by ;. In a path a pad name is that pad's centre, name@x,y a point inside that pad or via, vN(x,y) a via of type N, cw(c..) or ccw(c..) an arc to the next point about the centre after c; other vN are vias at no path point)
3.9V/5V: C23.1 D2.1 D3.1 J4.1 | length 17
  Top Layer w0.305: D2.1@-53.746,6.553 -53.746,7.722 C23.1@-54.407,8.382 -52.374,10.415 -50.181,10.415 ; J4.1@-50.181,14.804 -50.181,10.415 ; D3.1@-46.33,6.563 -50.181,10.415
5V: P1.5 pad.@-23.495,28.575 | length 33.2
  Top Layer w0.305: P1.5@-53.274,26.782 -52.233,26.782 ; -52.187,26.807 -48.057,30.937 -24.486,30.937 -23.495,29.947 pad.@-23.495,28.575
12V: C28.1 P2.A1 P2.A2 P2.B1 P2.B2 pad.@-26.035,28.575 R22.1 U5.1 | length 15
  Top Layer w0.254: v3(-40.462,21.742) v3@-40.361,21.641
  Top Layer w0.381: U5.1@-50.114,18.72 -50.114,20.574 -48.123,22.565 C28.1@-46.203,22.565 -46.137,22.631 -46.086,22.581 v3(-44.221,22.581) -44.221,22.631 -43.993,22.403 P2.A2@-43.536,22.403 ; P2.A1@-43.536,21.158 P2.A1@-43.536,21.133 v3(-42.901,21.768) P2.B2@-42.266,22.403 ; R22.1@-42.494,19.685 -42.494,20.904 P2.B1@-42.266,21.133 -42.266,21.158 -41.681,21.742 v3(-40.462,21.742)
14: pad.15@-3.327,27.737 U6.D4 | length 27.1
  Top Layer w0.152: U6.D4@-24.673,14.062 v2(-24.181,14.554)
  Top Layer w0.254: U6.D4@-24.673,14.011 U6.D4@-24.673,14.062
  Bottom Layer w0.152: v2(-24.181,14.554) -17.475,21.26 -13.741,21.26 -8.687,26.314 -4.75,26.314 pad.15@-3.327,27.737
29: pad.16@-3.327,25.197 U6.D12 | length 18
  Top Layer w0.152: -16.418,14.011 -5.232,25.197 pad.16@-3.327,25.197
  Top Layer w0.254: U6.D12@-16.673,14.011 -16.418,14.011
30: pad.@-3.327,30.277 U6.D11 | length 22.7
  Top Layer w0.152: U6.D11@-17.673,14.011 -17.206,14.478 -16.383,14.478 -9.55,21.311 -9.55,24.054 pad.@-3.327,30.277
31: pad.15@-3.353,20.218 U6.E12 | length 16.3
  Top Layer w0.152: U6.E12@-16.673,13.011 -16.173,13.011 -8.966,20.218 pad.15@-3.353,20.218
32: pad.@-3.353,22.758 U6.E11 | length 18.4
  Top Layer w0.152: U6.E11@-17.596,13.011 -17.069,13.538 -16.307,13.538 -7.087,22.758 pad.@-3.353,22.758
  Top Layer w0.254: U6.E11@-17.673,13.011 U6.E11@-17.596,13.011
-12V: C31.2 P2.G1 P2.G2 P2.H1 P2.H2 P2.J2 pad.@-28.575,28.575 R27.1 | length 12.8
  Top Layer w0.254: P2.H1@-34.646,21.133 -33.478,19.966 R27.1@-33.478,19.66
  Top Layer w0.381: P2.G1@-35.916,21.031 v3@-35.331,21.615 ; P2.G2@-35.916,22.403 v3(-35.281,23.038) ; P2.H1@-34.646,21.133 v3(-34.011,21.768) ; P2.H2@-34.646,22.403 v3(-34.036,23.012) ; P2.J2@-33.376,22.403 -33.35,22.403 v3(-32.715,23.038) ; C31.2@-31.752,17.374 -32.36,17.374 -35.331,20.345 v3@-35.331,21.615 ; v3@-35.331,21.615 -35.268,21.679 v3(-35.331,21.742) v3@-35.331,21.615
Batt_Vin: C1.1 C2.1 C4.2 J3.2 P1.1 P1.3 P2.A5 P2.A6 P2.A7 P2.B7 P2.K7 P2.L5 P2.L6 P2.L7 | length 30.3
  Top Layer w0.152: P2.A5@-43.536,26.213 P2.A5@-43.51,26.213 ; P2.L5@-30.861,26.213 P2.L5@-30.836,26.213 ; P2.L6@-30.836,27.483 P2.L6@-30.81,27.483 ; v3@-30.226,28.143 v3(-30.175,28.143)
  Top Layer w0.254: v3(-44.247,26.797) -44.221,26.797 P2.A6@-43.536,27.483 ; v11(-44.221,28.042) -44.221,28.067 P2.A7@-43.536,28.753 ; P2.A5@-43.51,26.213 v3(-42.901,26.822) ; v3(-42.901,28.118) P2.B7@-42.266,28.753 ; P2.K7@-32.106,28.753 v3(-31.496,28.143) -30.886,28.753 P2.L7@-30.836,28.753 v3@-30.226,28.143 ; v3(-31.471,26.822) P2.L5@-30.861,26.213 ; P2.L6@-30.836,27.483 v3(-30.175,28.143) ; P2.L6@-30.81,27.483 v3(-30.175,26.848)
  Top Layer w0.305: C4.2@-59.284,28.449 v7@-57.781,28.449 ; v7(-57.78,28.448) -57.78,27.483 -57.079,26.782 P1.1@-55.784,26.782 -54.946,26.782 -54.427,26.264 -54.427,25.375 -54.92,24.882 P1.3@-55.784,24.882 ; C1.1@-45.722,29.54 -45.339,29.54 -45.009,29.21 -45.009,27.559 v3(-44.247,26.797) ; v3(-30.175,26.848) -29.009,26.848 C2.1@-28.092,25.932
  Top Layer w0.508: v7@-57.781,28.449 v7(-57.78,28.448) ; J3.2@-54.947,14.728 -54.947,16.046 v6(-54.305,16.688)
  Bottom Layer w0.508: v6(-54.305,16.688) v6(-54.305,20.701)
Battery: F2.1 J3.1 pad.@-60.503,5.08 | length 8
  Top Layer w0.305: v6(-61.773,7.671) -61.722,7.722 F2.1@-59.104,7.722
  Top Layer w0.508: v6(-61.773,7.671) -61.773,6.35 pad.@-60.503,5.08 ; v6(-56.591,16.688) -55.947,16.043 J3.1@-55.947,14.728